# Altium PCB EvvGC v1.3.PcbDoc
Units mm, origin at the board's own origin, x right, y up, seen from the top; angles counter-clockwise.
Board outline 50 x 50 mm, 2 copper layers (Top Layer, Bottom Layer); 98 components, 78 nets, 374 pads, 100 vias.
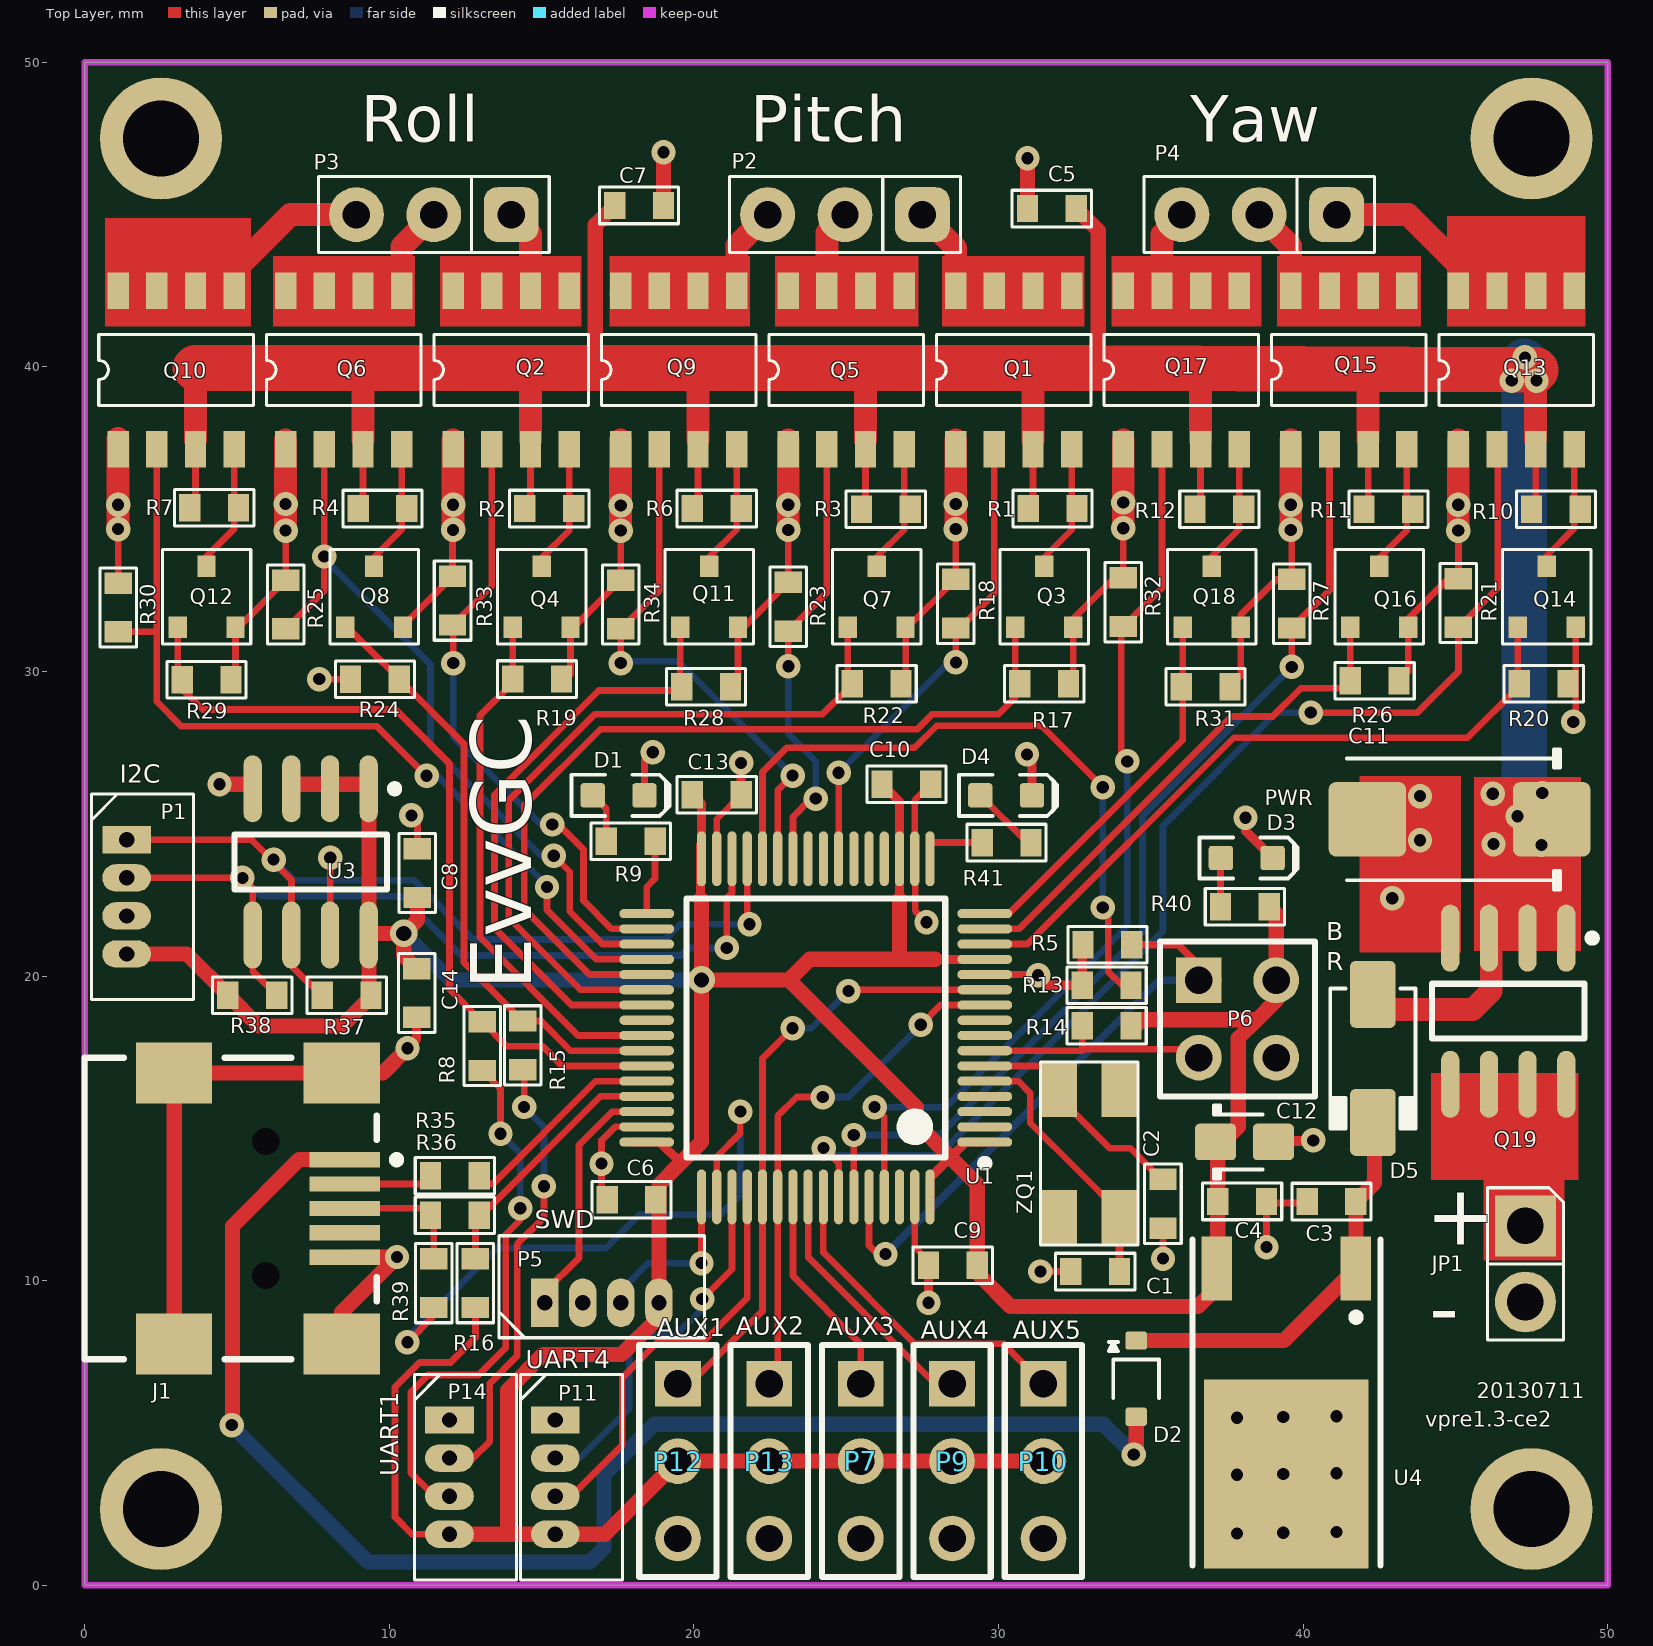
[diagram p0: Top Layer view]
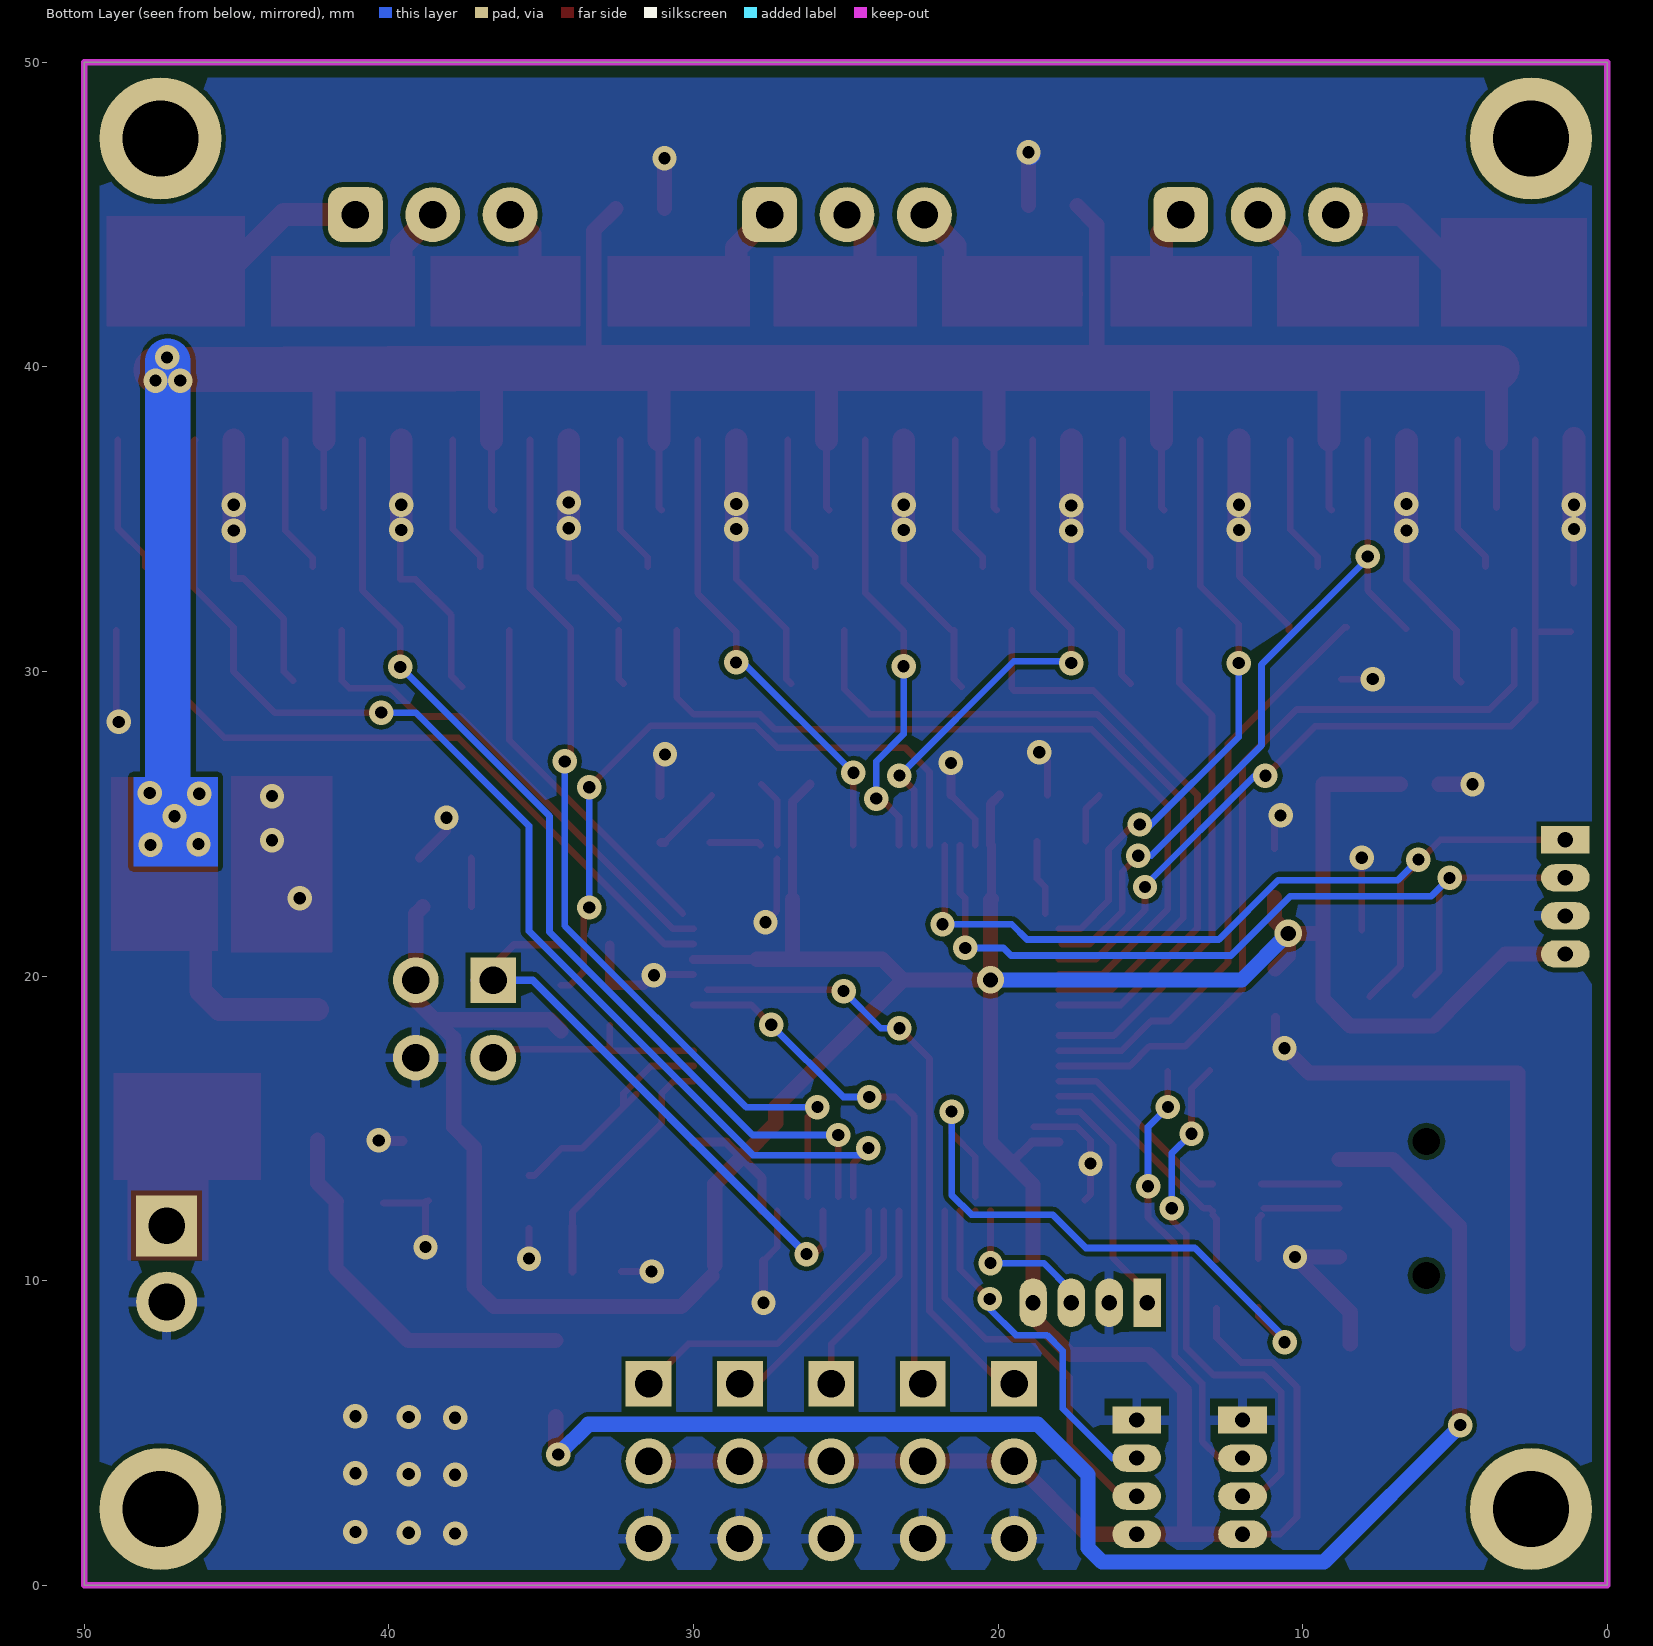
[diagram p1: Bottom Layer view, seen from below]

## Layer stack, top to bottom
Top Layer: signal copper 0.0356
Dielectric: dielectric 0.32, FR-4, Dk 4.8
Bottom Layer: signal copper 0.0356

## Board outline
0,0 0,50 50,50 50,0

## Design rules (kind name [scope] priority, off if disabled: settings)
Clearance Clearance_1 [(OnLayer('Keep-Out Layer')) vs inPolygon] p1: gap=0.381
Clearance [All] p2: gap=0.152
ComponentClearance [All] p1 off: gap=0.254 collisioncheckmode=3 verticalgap=0.254 showdistances=FALSE
Height [All] p1 off: minheight=0 maxheight=25.4 prefheight=12.7
HoleSize [All] p1: absolutevalues=TRUE maxlimit=2.54 minlimit=0.33 maxpercent=80.000 minpercent=20.000
HoleToHoleClearance [All] p1: gap=0.254 allowstackedmicrovias=FALSE
MinimumAnnularRing [All] p1: minimumring=0.178
MinimumSolderMaskSliver [All] p1 off: minsoldermaskwidth=0.254
NetAntennae [All] p1 off: netantennaetolerance=0
PolygonConnect [IsPoly vs IsVia] p1: connectstyle=Direct reliefconductorwidth=0.254 reliefentries=4 polygonreliefangle="90 Angle" airgapwidth=0.254
PolygonConnect PolygonConnect_1 [All] p2: connectstyle=Relief reliefconductorwidth=0.3 reliefentries=4 polygonreliefangle="90 Angle" airgapwidth=0.254
RoomDefinition "EvvGC v1.3" [InComponentClass('EvvGC v1.3')] p1 off: confinementstyle=ConfineIn formatcopy=TRUE lockcomponents=FALSE outline -128.3,-50.8 -77.5,-50.8 -77.5,-25.4 -128.3,-25.4
RoutingVias [All] p1: holewidth=0.4 width=0.8 viastyle="Through Hole" minholewidth=0.4 minwidth=0.8 maxholewidth=0.4 maxwidth=0.8
SilkToSilkClearance [All] p1 off: silktosilkclearance=0.254
SilkToSolderMaskClearance SilkscreenOverComponentPads [IsPad] p1 off: minsilkscreentomaskgap=0.254 clearancetoexposedcopper=TRUE
SolderMaskExpansion [All] p1: expansion=0.05
Width [All] p1: maxlimit=2 minlimit=0.152 preferedwidth=0.22
20 further rules are at their usual default settings.

## Components (designator, comment, footprint, x,y, rotation, side; value= is the part's Value field where it differs from the comment)
C1 "22pF" c-0603 33.975,10.3 r180 top
C2 "22pF" c-0603 35.4,13.325 r270 top
C3 "100nF" c-0603 41.732,12.598 r180 top
C4 "100nF" C-0603 37.2,12.6 r0 top
C5 "100nF" c-0603 32.55,45.2 r180 top
C6 "100nF" c-0603 18.75,12.65 r180 top
C7 "100nF" c-0603 17.4,45.3 r0 top
C8 "100nF" c-0603 10.922,22.581 r90 top
C9 "100nF" c-0603 29.3,10.5 r180 top
C10 "100nF" c-0603 26.175,26.3 r0 top
C11 "100uF25V" CAPMP7343X310N 45.136,25.146 r180 top
C12 "10uF6.3v" CAPMP2012X150USR 38.075,14.554 r0 top
C13 "100nF" c-0603 19.95,25.95 r0 top
C14 "1uF" c-0603 10.897,20.244 r270 top (schematic designator C8)
D1 "APT1608SGC" LED-0603-GREEN 17.526,25.933 r0 top
D2 "SS14" SOD323 34.519,6.782 r270 top
D3 "APT1608QBC/D" LED-0603-BLUE 38.151,23.876 r0 top
D4 "APT1608SGC" LED-0603-GREEN 30.251,25.933 r0 top
D5 "SS14" DO-214AC 42.291,17.297 r270 top (schematic designator D2)
J1 "USB Mini" 440247 0.686,12.37 r180 top
JP1 "POWER" IDC1-2P 47.3,11.8 r270 top
P1 "I2C" H53047-04 1.375,24.475 r270 top
P2 "Header 3" IDC1-3M 27.5,45 r0 top
P3 "Header 3" IDC1-3M 14,45 r0 top
P4 "Header 3" IDC1-3M 41.1,45 r0 top
P5 "SWD" H53047-04 15.1,9.275 r0 top
P6 "BOOT" HDR2X2 36.576,19.863 r270 top
P7 "Aux3" HDR1X3 25.475,6.615 r270 top
P9 "Aux4" HDR1X3 28.475,6.615 r270 top
P10 "Aux5" HDR1X3 31.475,6.615 r270 top
P11 "UART4" H53047-04 15.45,5.425 r270 top locked
P12 "Aux1" HDR1X3 19.475,6.615 r270 top
P13 "Aux2" HDR1X3 22.475,6.615 r270 top
P14 "UART1" H53047-04 11.975,5.425 r270 top
Q1 "SI4599DY" SO8-(SOT-96-1) 28.595,37.3 r90 top
Q2 "SI4599DY" SO8-(SOT-96-1) 12.095,37.3 r90 top
Q3 "BSS123" SOT-23 30.55,31.45 r0 top
Q4 "BSS123" SOT-23 14.05,31.45 r0 top
Q5 "SI4599DY" SO8-(SOT-96-1) 23.095,37.3 r90 top
Q6 "SI4599DY" SO8-(SOT-96-1) 6.595,37.3 r90 top
Q7 "BSS123" SOT-23 25.05,31.45 r0 top
Q8 "BSS123" SOT-23 8.55,31.45 r0 top
Q9 "SI4599DY" SO8-(SOT-96-1) 17.595,37.3 r90 top
Q10 "SI4599DY" SO8-(SOT-96-1) 1.095,37.3 r90 top
Q11 "BSS123" SOT-23 19.55,31.45 r0 top
Q12 "BSS123" SOT-23 3.05,31.45 r0 top
Q13 "SI4599DY" SO8-(SOT-96-1) 45.095,37.3 r90 top
Q14 "BSS123" SOT-23 47.05,31.45 r0 top
Q15 "SI4599DY" SO8-(SOT-96-1) 39.595,37.3 r90 top
Q16 "BSS123" SOT-23 41.55,31.45 r0 top
Q17 "SI4599DY" SO8-(SOT-96-1) 34.095,37.3 r90 top
Q18 "BSS123" SOT-23 36.05,31.45 r0 top
Q19 "IRF9335" SO-8_N 46.736,18.847 r270 top
R1 "330" r-0603 32.575,35.35 r180 top
R2 "330" r-0603 16.05,35.35 r180 top
R3 "330" r-0603 27.1,35.325 r180 top
R4 "330" r-0603 10.575,35.35 r180 top
R5 "10k" R-0603 34.375,21.025 r180 top
R6 "330" r-0603 21.55,35.35 r180 top
R7 "330" r-0603 5.05,35.375 r180 top
R8 "100" R-0603 13.05,18.5 r270 top
R9 "330" R-0603 18.725,24.425 r180 top
R10 "330" r-0603 49.1,35.325 r180 top
R11 "330" r-0603 43.6,35.325 r180 top
R12 "330" r-0603 38.05,35.325 r180 top
R13 "10k" R-0603 32.75,19.7 r0 top
R14 "10k" R-0603 32.75,18.375 r0 top
R15 "100" R-0603 14.375,18.525 r270 top
R16 "1k5" R-0603 12.827,9.119 r90 top
R17 "1k" r-0603 32.3,29.6 r180 top
R18 "1k" r-0603 28.6,33.025 r270 top
R19 "1k" r-0603 15.65,29.752 r180 top
R20 "1k" r-0603 48.7,29.6 r180 top
R21 "1k" r-0603 45.1,33.05 r270 top
R22 "1k" r-0603 26.8,29.6 r180 top
R23 "1k" r-0603 23.1,32.925 r270 top
R24 "1k" r-0603 8.725,29.75 r0 top
R25 "1k" r-0603 6.6,33 r270 top
R26 "1k" r-0603 43.15,29.7 r180 top
R27 "1k" r-0603 39.625,33.025 r270 top
R28 "1k" r-0603 21.2,29.5 r180 top
R29 "1k" r-0603 4.8,29.726 r180 top
R30 "1k" r-0603 1.1,32.9 r270 top
R31 "1k" r-0603 37.6,29.5 r180 top
R32 "1k" r-0603 34.1,33.075 r270 top
R33 "1k" r-0603 12.075,33.125 r270 top
R34 "1k" r-0603 17.6,33 r270 top
R35 "22" R-0603 12.95,13.45 r180 top
R36 "22" R-0603 12.95,12.15 r180 top
R37 "4.7k" R-0603 7.8,19.376 r0 top
R38 "4.7k" R-0603 6.3,19.375 r180 top
R39 "220" R-0603 11.455,9.119 r90 top (schematic designator R16)
R40 "1k" R-0603 38.887,22.276 r180 top (schematic designator R9)
R41 "330" R-0603 29.464,24.384 r0 top (schematic designator R9)
U1 "STM32F103RCT6" LQFP64_N 24,18.3 r180 top locked
U3 "24C02C-E/SN" SOIC-SN8_N 7.417,23.749 r270 top
U4 "78M33" TO-252 39.45,7.025 r180 top
ZQ1 "8MHz" 7B_6x3.2 34.075,11.975 r90 top

## Footprints (in the part's own frame and the unit in brackets; to place one, negate y for a bottom-side part, rotate by r counter-clockwise, add the part's x,y. Pads: shape width x height; smd on the part's side, far side on the other; paste and mask are expansions set on the pad)
7B_6x3.2 [mm]
  rect 1.8x1.2 smd: 1(0.1,0.1) 2(4.3,2.1) 3(4.3,0.1) 4(0.1,2.1)
  silkscreen extent -0.8,-0.5 5.2,2.7
440247 [mm] "Connector; USB2.0, Type B, SM; 5 Position; Right Angle"
  rect 2.3x0.5 smd: 1(-7.85,-1.6) 2(-7.85,-0.8) 3(-7.85,0) 4(-7.85,0.8) 5(-7.85,1.6)
  rect 2.5x2 smd: 6(-7.75,4.45) 7(-2.25,4.45) 8(-7.75,-4.45) 9(-2.25,-4.45)
  round 0.6 hole 0.9 unplated: MH1(-5.25,2.2) MH2(-5.25,-2.2)
  silkscreen extent -9.68,-4.95 0.7,4.95
c-0603 [mm]
  rect 0.7x0.9 smd: 1(0,0) 2(1.6,0)
  silkscreen extent -0.5,-0.6 2.1,0.6
C-0603 [mm]
  rect 0.7x0.9 smd: 1(0,0) 2(1.6,0)
  silkscreen extent -0.5,-0.6 2.1,0.6
CAPMP2012X150USR [mm] "Molded body capacitor, Body 2.0x1.2mm, 0805, IPC Medium Density"
  round 0.254 on Mech14: 0(0,0)
  rrect25% 1.35x1.2 smd: 1(-0.95,0) 2(0.95,0)
  Top Layer pour cut-out: -0.4,0.8 0.4,0.8 0.4,-0.8 -0.4,-0.8
  silkscreen extent -1,-1.2 0.6,1.2, body extent -1.02,-0.67 1.03,0.68, height 1.5
CAPMP7343X310N [mm] "Molded body capacitor, Body 7.3x4.3mm, 2917, IPC Nominal settings"
  round 1 on Mech14: 0(0,0)
  rrect20% 2.55x2.45 smd: 1(-3.025,0) 2(3.025,0)
  silkscreen extent -3.3,-2.3 3.7,2.3, body extent -3.8,-1.97 3.8,1.98, height 3.1
DO-214AC [mm] "JEDEC DO214 variation AC. SMA"
  round 0.508 on Mech14: 0(0,0)
  rrect25% 2.2x1.5 smd: A(-2.1,0) K(2.1,0)
  silkscreen extent -2.3,-1.4 2.3,1.4, body extent -2.6,-1.3 2.6,1.3, height 2.42
H53047-04 [mm]
  rect 0.9x1.6 hole 0.5: 1(0,0)
  oval 0.9x1.6 hole 0.5: 2(1.25,0) 3(2.5,0) 4(3.75,0)
  silkscreen extent -1.5,-1.15 5.25,2.2
HDR1X3 [mm] "Connector; Header; 3 Position"
  rect 1.5x1.5 hole 0.9: 1(0,0)
  round 1.5 hole 0.9: 2(2.54,0) 3(5.08,0)
  silkscreen extent -1.27,-1.27 6.35,1.27
HDR2X2 [mm] "Connector; Header; 2x2 Position"
  rect 1.5x1.5 hole 0.9: 1(0,0)
  round 1.5 hole 0.9: 2(0,2.54) 3(2.54,0) 4(2.54,2.54)
  silkscreen extent -1.27,-1.27 3.81,3.81
IDC1-2P [mm]
  rect 2x2 hole 1.2: 1(0,0)
  round 2 hole 1.2: 2(2.5,0)
  silkscreen extent -1.25,-1.25 3.75,1.25
IDC1-3M [mm]
  rrect50% 1.8x1.8 hole 0.9: 1(0,0)
  round 1.8 hole 0.9: 2(-2.54,0) 3(-5.08,0)
  silkscreen extent -6.33,-1.25 1.25,1.25
LED-0603-BLUE [mm]
  round 0.254 on Mech14: 0(0,0)
  rrect25% 0.8x0.8 smd: A(-0.85,0) K(0.85,0)
  Top Layer pour cut-out: -0.5,0.5 0.5,0.5 0.5,-0.5 -0.5,-0.5
  silkscreen extent -1.55,-0.67 1.68,0.67, body extent -0.8,-0.4 0.8,0.4, height 0.75
LED-0603-GREEN [mm]
  round 0.254 on Mech14: 0(0,0)
  rrect25% 0.8x0.8 smd: A(-0.85,0) K(0.85,0)
  Top Layer pour cut-out: -0.5,0.5 0.5,0.5 0.5,-0.5 -0.5,-0.5
  silkscreen extent -1.55,-0.67 1.68,0.67, body extent -0.8,-0.4 0.8,0.4, height 0.75
LQFP64_N [mm] "Thin QFP, 64-Leads, Body 10x10mm, Pitch 0.5mm, IPC Medium Density"
  oval 1.8x0.3 smd: 1(-5.55,3.75) 2(-5.55,3.25) 3(-5.55,2.75) 4(-5.55,2.25) 5(-5.55,1.75) 6(-5.55,1.25) 7(-5.55,0.75) 8(-5.55,0.25) 9(-5.55,-0.25) 10(-5.55,-0.75) 11(-5.55,-1.25) 12(-5.55,-1.75) 13(-5.55,-2.25) 14(-5.55,-2.75) 15(-5.55,-3.25) 16(-5.55,-3.75) 33(5.55,-3.75) 34(5.55,-3.25) 35(5.55,-2.75) 36(5.55,-2.25) 37(5.55,-1.75) 38(5.55,-1.25) 39(5.55,-0.75) 40(5.55,-0.25) 41(5.55,0.25) 42(5.55,0.75) 43(5.55,1.25) 44(5.55,1.75) 45(5.55,2.25) 46(5.55,2.75) 47(5.55,3.25) 48(5.55,3.75)
  oval 0.3x1.8 smd: 17(-3.75,-5.55) 18(-3.25,-5.55) 19(-2.75,-5.55) 20(-2.25,-5.55) 21(-1.75,-5.55) 22(-1.25,-5.55) 23(-0.75,-5.55) 24(-0.25,-5.55) 25(0.25,-5.55) 26(0.75,-5.55) 27(1.25,-5.55) 28(1.75,-5.55) 29(2.25,-5.55) 30(2.75,-5.55) 31(3.25,-5.55) 32(3.75,-5.55) 49(3.75,5.55) 50(3.25,5.55) 51(2.75,5.55) 52(2.25,5.55) 53(1.75,5.55) 54(1.25,5.55) 55(0.75,5.55) 56(0.25,5.55) 57(-0.25,5.55) 58(-0.75,5.55) 59(-1.25,5.55) 60(-1.75,5.55) 61(-2.25,5.55) 62(-2.75,5.55) 63(-3.25,5.55) 64(-3.75,5.55)
  silkscreen extent -5.68,-4.25 4.25,4.57, body extent -5,-5 5,5, height 1.6
r-0603 [mm]
  rect 0.7x0.9 smd: 1(0,0) 2(1.6,0)
  silkscreen extent -0.5,-0.6 2.1,0.6
R-0603 [mm]
  rect 0.7x0.9 smd: 1(0,0) 2(1.6,0)
  silkscreen extent -0.5,-0.6 2.1,0.6
SO8-(SOT-96-1) [mm]
  rect 1.2x0.7 smd: 1(0,0) 2(0,-1.27) 3(0,-2.54) 4(0,-3.81) 5(5.2,-3.81) 6(5.2,-2.54) 7(5.2,-1.27) 8(5.2,0)
  silkscreen extent 1.43,-4.44 3.77,0.64
SO-8_N [mm] "SOIC, 8-Leads, Body 4.9x3.9mm, Pitch 1.27mm, IPC Medium Density"
  oval 2.2x0.6 smd: 1(-2.4,1.905) 2(-2.4,0.635) 3(-2.4,-0.635) 4(-2.4,-1.905) 5(2.4,-1.905) 6(2.4,-0.635) 7(2.4,0.635) 8(2.4,1.905)
  silkscreen extent -2.52,-2.5 0.9,2.88, body extent -2,-2.5 2,2.5, height 1.75
SOD323 [mm] "SOD-323; 2 Leads; Body 1.8 x 1.35 mm, (LxW)"
  round 0.508 on Mech14: 0(0,0)
  rrect25% 0.6x0.7 smd: A(1.25,0) K(-1.25,0)
  silkscreen extent -1.2,-0.9 0.64,0.75, body extent -1.3,-0.68 1.3,0.68, height 1.1
SOIC-SN8_N [mm] "SOIC, 8-Leads, Body 4.9x3.8mm, Pitch 1.27mm, IPC Medium Density"
  oval 2.2x0.6 smd: 1(-2.4,1.905) 2(-2.4,0.635) 3(-2.4,-0.635) 4(-2.4,-1.905) 5(2.4,-1.905) 6(2.4,-0.635) 7(2.4,0.635) 8(2.4,1.905)
  silkscreen extent -2.52,-2.5 0.9,2.88, body extent -2,-2.5 2,2.5, height 1.75
SOT-23 [mm]
  rect 0.6x0.7 smd: 1(0,0) 2(1.9,0) 3(0.95,2)
  silkscreen extent -0.5,-0.55 2.4,2.55
TO-252 [mm] "D-PAK/TO-252-AA; 3 Leads (1 Cropped); Body 10.1 (inc. leads) x 6.6 mm (LxW max)"
  rect 1x2.1 smd: 1(-2.285,-3.375) 3(2.285,-3.375)
  rect 5.4x6.2 smd: 4(0,3.375)
  silkscreen extent -3.09,-4.32 3.09,6.38

## Part data
C1 C2 C3 C4 C5 C6 C7 C8 C9 C10 C13 C14: library part CAP0805, "Capacitor"
C11 C12: library part CT, "Capacitor Tantalum"
D1 D3 D4: library part LED
D2 D5: library part "DIODE SCHOTTKY", "Diode"
J1: library part 440247-2, "USB 2.0, Right Angle, SMT, B Type, Receptacle, 5 Position, Black"
JP1: library part CON2, "Header, 2-Pin"
P1 P5 P11 P14: library part "Header 4", "0530470410"
P2 P3 P4: "Header, 3-Pin"
P6: library part "Header 2X2", "Header, 2-Pin, Dual row"
P7 P9 P10 P12 P13: library part "Header 3", "Header, 3-Pin"
Q1 Q2 Q5 Q6 Q9 Q10 Q13 Q15 Q17: library part AUIRF7343, "HEXFET Power MOSFET"
Q3 Q4 Q7 Q8 Q11 Q12 Q14 Q16 Q18: library part 2N7002, "N-channel Enhancement Mode Field-effect Transistor"
Q19: library part IRF7404, "HEXFET Power MOSFET"
R1 R2 R3 R4 R6 R7 R10 R11 R12 R17 R18 R19 R20 R21 R22 R23 R24 R25 R26 R27 R28 R29 R30 R31 R32 R33 R34 R39: library part Res, "Resistor"
R5 R8 R9 R13 R14 R15 R16 R35 R36 R37 R38 R40 R41: library part "RES 0603 330R", "Resistor"
U1: library part STM32F103RBT6, "STM32 ARM-based 32-bit MCU with 128 Kbytes Flash, 64-pin LQFP, Industrial Temperature"
U3: "2Kbit, 400kHz, 5V, I2C Serial EEPROM, 8-Pin SOIC 150mil, Extended Temperature"
U4: library part L78M05CDT, "Positive Voltage Regulator"
ZQ1: library part ZQ_KX12B, "7B-8.000MAAJ-T"

## Free pads (board coordinates)
  round 4 hole 2.5: 0(2.5,2.5) 0(2.5,47.5) 0(47.5,2.5) 0(47.5,47.5)

## Via types
v1: diameter 0.8, hole 0.4, Top Layer to Bottom Layer, tented both sides, 98 vias
v2: diameter 0.9, hole 0.5, Top Layer to Bottom Layer, tented both sides, 2 vias

## Nets (pads, with @x,y where several pads share a name; then routed paths per layer and width w, separated by ;. In a path a pad name is that pad's centre, name@x,y a point inside that pad or via, vN(x,y) a via of type N, cw(c..) or ccw(c..) an arc to the next point about the centre after c; other vN are vias at no path point)
3V-IN: C3.1 D2.K D5.K U4.1 | length 12.7
  Top Layer w0.5: D2.K 39.367,8.032 U4.1 41.735,12.596 C3.1 42.342,13.208 D5.K@42.342,14.613
12V: JP1.1 Q19.5 Q19.6 Q19.7 Q19.8
"12V MOTOR": C5.1 C7.1 C11.1 D5.A Q1.3 Q2.3 Q5.3 Q6.3 Q9.3 Q10.3 Q13.3 Q15.3 Q17.3 Q19.1 Q19.2 Q19.3 R1.2 R2.2 R3.2 R4.2 R6.2 R7.2 R10.2 R11.2 R12.2 | length 115.8
  Top Layer w0.22: R7.2@3.635,35.385 Q10.3@3.635,37.6 ; R4.2@9.05,35.3 9.135,35.385 Q6.3@9.135,37.6 ; R2.2@14.55,35.3 14.635,35.385 Q2.3@14.635,37.6 ; R6.2@20.05,35.3 20.135,35.385 Q9.3@20.135,37.6 ; R3.2@25.55,35.3 25.635,35.385 Q5.3@25.635,37.6 ; R1.2@31.05,35.3 31.135,35.385 Q1.3@31.135,37.6 ; R12.2@36.55,35.3 36.635,35.385 Q17.3@36.635,37.6 ; R11.2@42.135,35.385 Q15.3@42.135,37.6 ; R10.2@47.635,35.385 Q13.3 Q13.3@47.635,37.6
  Top Layer w0.5: 16.739,39.965 16.764,39.99 16.764,44.664 C7.1 ; C5.1 33.275,44.475 33.275,39.965
  Top Layer w0.75: Q10.3@3.635,37.6 3.635,39.965 ; Q6.3@9.135,37.6 9.135,39.9 ; Q2.3@14.635,37.6 14.635,39.93 ; Q9.3@20.135,37.6 20.135,39.9 ; Q5.3@25.635,37.6 25.635,39.8 ; Q1.3@31.135,37.6 31.135,39.8 ; Q17.3@36.635,37.6 36.635,39.83 ; Q15.3@42.135,37.6 42.135,39.9 ; D5.A@42.342,18.9 45.57,18.9 46.177,19.507 Q19.3@46.177,20.993 ; Q13.3@47.635,37.6 v1@47.635,39.9
  Top Layer w1.5: 3.635,39.965 16.739,39.965 33.275,39.965 46.877,39.903 47.28,39.902 v1@47.635,39.9
  Bottom Layer w1.5: 47.26,26.28 v1@47.26,40.183
  other v1: 47.828,24.308 46.253,24.333 47.041,25.248 46.228,25.984 47.854,26.01 46.85,39.55 47.662,39.55 47.281,40.312
+3.3V: C4.1 C6.1 C8.1 C9.1 C10.1 C12.1 C13.1 C14.1 P1.4 P5.4 P6.2 P7.2 P9.2 P10.2 P11.4 P12.2 P13.2 P14.4 R14.2 R16.1 R37.2 R38.2 R40.1 U1.1 U1.13 U1.19 U1.32 U1.48 U1.64 U3.1 U3.2 U3.3 U3.8 U4.3 | length 154.3
  Top Layer w0.22: P14.4 10.746,1.675 10.185,2.235 10.185,6.502 10.996,7.313 12.012,7.313 12.827,8.128 R16.1@12.827,9.093
  Top Layer w0.3: U1.48@18,14.55 18.882,14.55 19.566,13.866 ; C13.1 20.25,25.65 U1.32@20.25,24.3 ; 20.218,22.53 U1.32@20.218,24.3 ; C10.1 26.75,25.725 26.75,22.525 ; U1.64@27.75,12.3 27.75,13.375 28.425,14.05 28.925,14.55 U1.1@30,14.55 ; 27.925,20.55 U1.13@30,20.55
  Top Layer w0.5: P1.4 3.35,20.725 R38.2 5.711,18.364 8.439,18.364 9.33,19.255 9.33,20.225 ; U3.3@6.79,26.3 9.33,26.3 U3.8@9.33,21.375 ; R37.2@9.33,19.395 9.33,20.225 ; U3.8@9.33,20.605 U3.8@9.33,21.375 ; C14.1 10.475,20.665 v2(10.475,21.4) ; C8.1 10.922,21.847 v2(10.475,21.4) ; P14.4 13.876,1.675 ; P5.4@18.75,9.375 P5.4 ; 20.218,22.53 20.25,22.498 v2(20.25,19.875) ; 26.75,20.55 26.75,22.525 ; 27.925,20.55 23.8,20.55 23.125,19.875 ; C9.1 29.3,13.175 28.425,14.05 27.3,15.175 27.3,15.7 23.125,19.875 ; C9.1@29.4,10.15 30.4,9.15 36.55,9.15 37.2,9.8 C4.1 37.2,14.375 37.871,15.046 37.871,17.958 38.481,18.567 ; P10.2 P9.2 P7.2 P13.2 P12.2 17.075,1.675 P11.4 13.876,1.675 ; R14.2@34.35,18.2 34.717,18.567 38.481,18.567 ; R40.1 39.116,22.047 P6.2 39.116,19.202 38.481,18.567 ; 9.33,20.225 U3.8@9.33,21.375 ; U3.8@9.33,21.375 9.355,21.4 v2(10.475,21.4) ; 13.876,1.675 13.876,6.401 15.05,7.575 17.625,7.575 18.85,8.8 P5.4 ; P5.4 18.85,13.15 19.566,13.866 20.25,14.55 v2(20.25,19.875) ; v2(20.25,19.875) 23.125,19.875
  Bottom Layer w0.5: v2(10.475,21.4) 12,19.875 v2(20.25,19.875)
+5V: D2.A J1.1 | length 47.8
  Top Layer w0.5: v1@4.851,5.258 4.851,11.786 7.041,13.975 J1.1@8.8,13.975 ; v1(34.442,4.293) 34.519,4.369 D2.A
  Bottom Layer w0.5: v1(4.826,5.258) 4.826,5.237 9.301,0.762 16.586,0.762 17.043,1.219 17.043,3.632 18.694,5.283 33.452,5.283 v1(34.442,4.293)
AUX1: P12.1 U1.11 U1.53 | length 20.4
  Top Layer w0.22: P12.1@19.4,6.69 P12.1 19.865,6.615 22.25,9 22.25,12.3 22.25,17.297 v1(23.241,18.288) ; v1(25.07,19.507) 25.113,19.55 U1.11
  Bottom Layer w0.22: v1(23.241,18.288) 23.851,18.288 v1(25.07,19.507)
AUX2: P13.1 U1.10 U1.54 | length 19.1
  Top Layer w0.22: P13.1@22.475,6.75 P13.1 22.75,6.89 22.75,10.726 ; 22.75,9.45 22.75,10.726 ; v1(24.232,16.027) 23.377,16.027 22.75,15.4 22.75,12.3 22.75,10.726 ; v1(27.45,18.4) 28.1,19.05 U1.10@30,19.05
  Bottom Layer w0.22: v1(24.232,16.027) 25.073,16.027 ; 25.075,16.025 v1(27.45,18.4)
AUX3: P7.1 U1.55 | length 6.6
  Top Layer w0.22: U1.55@23.25,12.3 23.25,11.151 23.25,10.15 25.475,7.925 P7.1
AUX4: P9.1 U1.56 | length 8
  Top Layer w0.22: U1.56@23.75,12.3 23.75,10.775 27.91,6.615 P9.1
AUX5: P10.1 U1.57 | length 10.4
  Top Layer w0.22: U1.57@24.25,12.3 24.25,10.925 27.25,7.925 30.165,7.925 P10.1
BOOT0: P6.1 R5.1 U1.60 | length 19.4
  Top Layer w0.22: U1.60@25.75,12.3 25.75,11.15 26.028,10.872 v1(26.288,10.872)
  Top Layer w0.254: R5.1 35.905,21.025 36.576,20.354 P6.1 ; P6.1@37.067,19.863 P6.1@37.211,19.863
  Bottom Layer w0.22: P6.1@36.817,19.622 37.059,19.863 P6.1@37.211,19.863
  Bottom Layer w0.254: v1(26.288,10.872) 35.278,19.863 P6.1
BOOT1: R13.2 U1.28 | length 22.1
  Top Layer w0.22: U1.28@22.25,24.3 22.25,26.7 23.05,27.5 27.251,27.5 27.971,28.219 31.406,28.219 v1(33.425,26.2) ; v1(33.425,22.25) 33.6,22.075 33.6,20.15 34.05,19.7 R13.2
  Bottom Layer w0.22: v1(33.425,22.25) v1(33.425,26.2)
DM: R35.1 U1.44 | length 6.4
  Top Layer w0.22: R35.1@12.95,13.175 13.4,13.175 16.775,16.55 U1.44@18,16.55
DP: R16.2 R36.1 U1.45 | length 8.1
  Top Layer w0.22: R16.2@12.827,10.693 12.827,12.027 R36.1 ; R36.1@12.95,12.275 13.05,12.375 13.25,12.375 16.925,16.05 U1.45@18,16.05
GND: C1.2 C2.2 C3.2 C4.2 C5.2 C6.2 C7.2 C8.2 C9.2 C10.2 C11.2 C12.2 C13.2 C14.2 D1.K D3.K D4.K J1.5 J1.6 J1.7 J1.8 J1.9 JP1.2 P1.3 P5.2 P6.4 P7.3 P9.3 P10.3 P11.1 P12.3 P13.3 P14.1 Q1.1 Q2.1 Q3.2 Q4.2 Q5.1 Q6.1 Q7.2 Q8.2 Q9.1 Q10.1 Q11.2 Q12.2 Q13.1 Q14.2 Q15.1 Q16.2 Q17.1 Q18.2 Q19.4 R5.2 R13.1 R17.1 R18.1 R19.1 R20.1 R21.1 R22.1 R23.1 R24.1 R25.1 R26.1 R27.1 R28.1 R29.1 R30.1 R31.1 R32.1 R33.1 R34.1 U1.12 U1.18 U1.31 U1.47 U1.63 U3.4 U3.7 U4.4 | length 138.3
  Top Layer w0.22: v1(1.095,34.675) 1.1,34.67 R30.1 ; v1@4.375,26.25 v1(4.425,26.3) ; R29.1@4.8,29.65 4.95,29.8 4.95,31.35 6.595,32.995 v1(6.595,34.625) ; v1@7.675,29.725 v1(7.7,29.75) R24.1 ; U3.7@8.06,21.5 v1(8.06,23.885) v1@8.15,23.975 ; Q8.2@10.45,31.35 10.45,31.5 R33.1 12.075,34.63 v1(12.095,34.65) ; v1(10.725,25.275) 10.922,25.078 C8.2 ; R19.1@15.65,29.6 15.95,29.9 15.95,31.35 17.595,32.995 v1(17.595,34.625) ; C6.2 16.967,12.833 16.967,14.605 17.412,15.05 U1.47@18.825,15.05 ; D1.K 18.376,27.076 v1(18.65,27.35) ; U1.31@20.75,24.3 20.75,25.15 C13.2 ; R28.1 21.45,29.75 21.45,31.35 21.525,31.35 23.095,32.92 v1(23.095,34.65) ; R22.1 26.95,29.75 26.95,31.385 28.595,33.03 R18.1 28.6,34.67 v1(28.595,34.675) ; U1.63@27.25,12.3 27.25,11.1 C9.2@27.7,10.65 ; U1.18 27.262,23.838 27.262,22.141 v1(27.635,21.768) ; U1.18@27.25,24.3 27.25,25.775 C10.2 ; U1.12@30,20.05 31.275,20.05 v1(31.3,20.025) ; v1(31.375,10.3) C1.2 ; R17.1 32.45,29.75 Q3.2@32.45,31.35 ; Q3.2@32.45,31.725 33.8,33.075 R32.1 v1@34.1,34.695 ; v1(35.4,10.725) C2.2 ; R31.1 37.95,29.85 37.95,31.85 39.125,33.025 R27.1 v1@39.625,34.62 ; C4.2@38.775,12.55 C4.2@38.8,12.55 ; v1(38.8,11.1) C4.2@38.8,12.55 ; C4.2 C4.2@38.8,12.55 ; C3.2@40.175,12.55 C4.2@38.8,12.55 ; R26.1 43.45,30 43.45,31.725 44.775,33.05 R21.1 v1@45.1,34.62 ; v1(48.87,28.346) 48.95,28.427 Q14.2@48.95,31.35
  Top Layer w0.3: v1(10.598,17.63) 10.897,17.928 C14.2 ; C13.2 v1(21.55,27) ; v1(27.7,9.275) C9.2@27.7,10.65 ; v1(30.937,27.28) 31.101,27.115 D4.K ; v1(31.3,20.025) 31.625,19.7 R13.1 R5.2@32.75,21.025 ; v1(38.111,25.197) 38.111,24.766 D3.K
  Top Layer w0.33: C12.2@39.558,14.58 v1@40.335,14.58
  Top Layer w0.5: J1.7 J1.9 J1.8 9.788,16.82 v1(10.598,17.63) ; v1(4.425,26.3) U3.4@5.52,26.3 ; J1.6 8.436,8.961 v1(10.25,10.775) J1.5@8.8,10.775 ; C7.2 v1(19,47.05) ; C5.2 v1(30.95,46.85)
  Top Layer w0.75: v1(1.095,34.675) v1(1.095,35.475) Q10.1@1.095,37.65 ; v1(6.595,34.625) v1(6.595,35.5) Q6.1@6.595,37.6 ; v1(12.095,34.65) v1(12.095,35.475) Q2.1@12.095,37.6 ; v1(17.595,34.625) v1(17.595,35.45) Q9.1@17.595,37.6 ; v1(23.095,34.65) v1(23.095,35.475) Q5.1@23.095,37.6 ; v1(28.595,34.675) v1(28.595,35.5) Q1.1@28.595,37.6 ; v1(34.095,34.7) v1(34.095,35.55) Q17.1@34.095,37.6 ; v1(39.595,34.65) v1(39.595,35.475) Q15.1@39.595,37.6 ; v1(45.095,34.625) v1(45.095,35.475) Q13.1@45.095,37.6
  Bottom Layer w0.5: v1@18.85,46.95 v1@18.9,46.9
  other v1: 37.825,1.7 39.35,1.725 41.1,1.75 37.825,3.625 39.35,3.65 41.1,3.675 37.825,5.5 39.35,5.525 41.1,5.55 16.967,13.843 40.335,14.605 42.926,22.555 43.84,24.46 43.84,25.908
LED1: R9.1 U1.33 | length 2.5
  Top Layer w0.22: U1.33 18.45,22.925 18.725,23.2 R9.1
LED2: R41.1 U1.17 | length 1.7
  Top Layer w0.22: U1.17@27.802,24.3 27.886,24.384 R41.1
NetC1_1: C1.1 U1.5 ZQ1.1 | length 8.3
  Top Layer w0.22: U1.5@30,16.55 30.65,16.55 31.04,16.16 31.04,15.185 32.65,13.575 33.975,12.25 ZQ1.1 ZQ1.1@33.975,11.775
  Top Layer w0.254: C1.1 ZQ1.1@33.975,11.775
NetC2_1: C2.1 U1.6 ZQ1.2 | length 7.8
  Top Layer w0.22: U1.6@30,17.05 31.4,17.05 32.3,16.15 ZQ1.2@32.3,15.7 ; ZQ1.2@31.875,16.125 33.65,14.35 34.325,14.35 35.225,13.45 C2.1@35.4,13.45
NetD1_A: D1.A R9.2 | length 1.7
  Top Layer w0.22: D1.A 17.125,25.484 R9.2
NetD3_A: D3.A R40.2 | length 1.6
  Top Layer w0.22: R40.2 37.287,23.862 D3.A
NetD4_A: D4.A R41.2 | length 2.3
  Top Layer w0.22: D4.A R41.2@30.951,24.384
  Top Layer w0.3: R41.2@30.951,24.384 R41.2
NetJ1_2: J1.2 R35.2 | length 2.5
  Top Layer w0.22: J1.2@8.8,13.175 R35.2@11.35,13.175
NetJ1_3: J1.3 R36.2 R39.2 | length 4
  Top Layer w0.22: J1.3@8.8,12.375 R36.2@11.275,12.375 ; R36.2 11.455,12.045 R39.2
NetP14_2: P14.2 R15.2 | length 14.8
  Top Layer w0.22: P14.2 12.75,4.175 13.3,4.725 13.3,6.625 14.197,7.522 14.197,11.197 15.075,12.075 v1(15.075,13.1) ; v1@14.425,15.8 v1(14.425,15.7) R15.2@14.425,16.875
  Bottom Layer w0.22: v1(14.425,15.7) 15.075,15.05 v1(15.075,13.1)
NetP14_3: P14.3 R8.2 | length 17.8
  Top Layer w0.22: P14.3 11.475,2.925 10.7,3.7 10.7,6.325 11.275,6.9 12.925,6.9 13.825,7.8 13.825,11.525 14.3,12 v1(14.3,12.375) ; R8.2 13.65,16.3 v1(13.65,14.825)
  Bottom Layer w0.22: v1(13.65,14.825) 14.3,14.175 v1(14.3,12.375)
NetQ1_4: Q1.4 Q3.3 R1.1 | length 4.5
  Top Layer w0.22: Q3.3 31.5,33.75 32.405,34.655 Q1.4@32.405,37.6
NetQ2_4: Q2.4 Q4.3 R2.1 | length 4.5
  Top Layer w0.22: Q4.3 15,33.725 15.905,34.63 Q2.4@15.905,37.6
NetQ5_4: Q5.4 Q7.3 R3.1 | length 4.5
  Top Layer w0.22: Q7.3 26,33.75 26.905,34.655 Q5.4@26.905,37.6
NetQ6_4: Q6.4 Q8.3 R4.1 | length 4.5
  Top Layer w0.22: Q8.3 9.5,33.75 10.405,34.655 Q6.4@10.405,37.6
NetQ9_4: Q9.4 Q11.3 R6.1 | length 4.5
  Top Layer w0.22: Q11.3 20.5,33.75 21.405,34.655 Q9.4@21.405,37.6
NetQ10_4: Q10.4 Q12.3 R7.1 | length 4.5
  Top Layer w0.22: Q12.3 4,33.775 4.905,34.68 4.905,35.715 Q10.4@4.905,37.6
NetQ13_4: Q13.4 Q14.3 R10.1 | length 4.5
  Top Layer w0.22: Q14.3 48,33.8 48.905,34.705 Q13.4@48.905,37.6
NetQ15_4: Q15.4 Q16.3 R11.1 | length 4.5
  Top Layer w0.22: Q16.3 42.5,33.725 43.405,34.63 Q15.4@43.405,37.6
NetQ17_4: Q17.4 Q18.3 R12.1 | length 4.5
  Top Layer w0.22: Q18.3 37,33.775 37.905,34.68 Q17.4@37.905,37.6
NRST: P6.3 R14.1 U1.7 | length 7.8
  Top Layer w0.22: U1.7@30,17.55 32.75,17.55 ; R14.1 32.75,17.6 36.299,17.6 P6.3 ; P6.3@36.984,17.55 P6.3@37.211,17.323
PA4: U1.20
PA5: U1.21
PA6: U1.22
PB9: U1.62
PC0: U1.8
PC1: U1.9
PC4: U1.24
PC5: U1.25
PITCHA: Q3.1 R17.2 U1.37 | length 27.7
  Top Layer w0.22: U1.37@18,20.05 16.575,20.05 14.425,22.2 14.425,25.6 16.925,28.1 27.325,28.1 27.816,28.592 29.992,28.592 30.55,29.15 Q3.1@30.55,31.35
PITCHAN: Q1.2 R18.2 U1.23 | length 15.6
  Top Layer w0.22: U1.23@24.75,24.3 v1(24.75,26.675) ; v1(28.6,30.3) 28.6,31.3 29.865,32.565 Q1.2@29.865,37.6
  Bottom Layer w0.22: v1(24.75,26.675) 28.375,30.3 v1(28.6,30.3)
PITCHAOUT: P2.1 Q1.5 Q1.6 Q1.7 Q1.8 | length 6.9
  Top Layer w0.75: P2.1 28.595,43.905 28.595,42.4 29.865,42.4 31.135,42.4 Q1.5@32.405,42.4
PITCHB: Q7.1 R22.2 U1.38 | length 23.5
  Top Layer w0.22: U1.38@18,19.55 16.275,19.55 13.925,21.9 13.925,25.775 16.75,28.6 24.225,28.6 25.05,29.425 Q7.1@25.05,31.35
PITCHBN: Q5.2 R23.2 U1.26 | length 14.7
  Top Layer w0.22: v1(23.1,30.175) R23.2 24.365,32.59 Q5.2@24.365,37.6 ; U1.26@23.25,24.3 23.25,25.225 23.85,25.825 v1(24,25.825) v1@24,25.7
  Bottom Layer w0.22: v1(23.1,30.175) 23.1,27.95 24,27.05 v1(24,25.825)
PITCHBOUT: P2.2 Q5.5 Q5.6 Q5.7 Q5.8 | length 6.7
  Top Layer w0.75: Q5.8@23.095,42.4 Q5.7@24.365,42.4 ; P2.2 24.365,44.405 Q5.7@24.365,42.4 ; Q5.5@26.905,42.4 25.635,42.4 25,42.4 Q5.7@24.365,42.4
PITCHC: Q11.1 R28.2 U1.39 | length 19.4
  Top Layer w0.22: U1.39@18,19.05 15.975,19.05 13.45,21.575 13.45,25.95 16.875,29.375 19.475,29.375 19.55,29.45 Q11.1@19.55,31.35
PITCHCN: Q9.2 R34.2 U1.27 | length 17.5
  Top Layer w0.22: v1(17.6,30.275) R34.2 18.865,32.665 Q9.2@18.865,37.6 ; U1.27@22.75,24.3 22.75,26.092 v1(23.24,26.582)
  Bottom Layer w0.22: v1@17.662,30.337 19.485,30.337 v1(23.24,26.582)
PITCHCOUT: P2.3 Q9.5 Q9.6 Q9.7 Q9.8 | length 6.8
  Top Layer w0.75: Q9.8@17.595,42.4 18.865,42.4 20.135,42.4 21.405,42.4 21.405,43.985 P2.3
ROLLA: Q4.1 R19.2 U1.41 | length 16.9
  Top Layer w0.22: Q4.1@14.05,31.35 14.05,29.625 12.975,28.55 12.975,21.275 16.2,18.05 U1.41@18,18.05
ROLLAN: Q2.2 R33.2 U1.34 | length 19.4
  Top Layer w0.22: v1(12.1,30.275) R33.2@12.1,31.525 ; R33.2@12.1,31.55 13.365,32.815 Q2.2@13.365,37.6 ; v1(15.35,24.975) 15.55,24.975 16.375,24.15 16.375,22.475 17.3,21.55 U1.34@18,21.55
  Bottom Layer w0.22: v1(12.1,30.275) 12.1,27.85 v1@15.025,24.925
ROLLAOUT: P3.1 Q2.5 Q2.6 Q2.7 Q2.8 | length 6.7
  Top Layer w0.75: Q2.8@12.095,42.4 13.365,42.4 14,42.4 Q2.6@14.635,42.4 ; P3.1 14.635,44.365 Q2.6@14.635,42.4 ; Q2.5@15.905,42.4 Q2.6@14.635,42.4
ROLLB: Q8.1 R15.1 R24.2 U1.42 | length 19.4
  Top Layer w0.22: Q8.1 8.625,31.45 9.25,30.825 R24.2 12.45,27.625 12.45,20.45 R15.1 14.975,18.525 15.95,17.55 U1.42@18,17.55
ROLLBN: Q6.2 R25.2 U1.35 | length 24.4
  Top Layer w0.22: R25.2 7.865,32.665 v1(7.865,33.775) Q6.2@7.865,37.6 ; v1(15.4,23.95) 15.925,23.425 15.925,22.125 17,21.05 U1.35@17.9,21.05
  Bottom Layer w0.22: v1@7.825,33.75 11.35,30.225 11.35,27.575 14.975,23.95 v1(15.4,23.95)
ROLLBOUT: P3.2 Q6.5 Q6.6 Q6.7 Q6.8 | length 6.8
  Top Layer w0.75: Q6.8@6.595,42.4 7.865,42.4 9.135,42.4 10.405,42.4 10.405,43.945 P3.2
ROLLC: Q12.1 R8.1 R29.2 U1.43 | length 26.2
  Top Layer w0.22: Q12.1@3.05,31.35 3.05,29.575 3.875,28.75 10.2,28.75 11.975,26.975 11.975,19.575 R8.1 13.85,17.7 15.025,17.7 15.675,17.05 U1.43@18,17.05
ROLLCN: Q10.2 R30.2 U1.36 | length 29
  Top Layer w0.22: R30.2@1.2,31.3 2.365,31.3 ; Q10.2@2.365,37.6 2.365,31.3 ; v1(11.225,26.575) 9.6,28.2 3.175,28.2 2.365,29.01 2.365,31.3 ; v1(15.175,22.925) 15.175,22.175 16.8,20.55 U1.36@18,20.55
  Bottom Layer w0.22: v1@11.575,26.575 v1@15.2,22.95
ROLLCOUT: P3.3 Q10.5 Q10.6 Q10.7 Q10.8 | length 9.3
  Top Layer w0.75: Q10.8@1.095,42.4 2.365,42.4 3.635,42.4 4.905,42.4 4.905,43.155 6.75,45 P3.3
RX: P11.3 U1.52 | length 13.2
  Top Layer w0.22: P11.3 15.975,2.925 17.65,4.6 17.65,6.825 18.9,8.075 20.4,8.075 21.75,9.425 U1.52@21.75,12.3
SCL: P1.1 R37.1 U1.29 U3.6 | length 29.6
  Top Layer w0.22: P1.1@1.5,24.475 5.475,24.475 6.79,23.16 6.79,21.5 6.79,20.335 R37.1@7.8,19.325 ; v1@21.75,21.7 U1.29@21.75,24.3
  Bottom Layer w0.22: v1(6.2,23.825) 6.875,23.15 10.8,23.15 12.75,21.2 19.05,21.2 19.55,21.7 v1(21.825,21.7)
SDA: P1.2 R38.1 U1.30 U3.5 | length 28.6
  Top Layer w0.22: P1.2 v1(5.175,23.225) 5.52,22.88 5.52,21.5 5.52,20.155 R38.1 ; v1(21.075,20.925) 21.075,22.55 21.25,22.725 U1.30@21.25,24.3
  Bottom Layer w0.22: v1(5.175,23.225) 5.775,22.625 10.4,22.625 12.35,20.675 19.575,20.675 19.825,20.925 20.825,20.925 v1(21.075,20.925)
SWCLK: P5.3 U1.49 | length 5.1
  Top Layer w0.22: v1(20.25,10.575) U1.49@20.25,12.3
  Bottom Layer w0.22: P5.3 17.6,9.675 18.5,10.575 v1(20.25,10.575)
SWDIO: P5.1 U1.46 | length 7.9
  Top Layer w0.22: P5.1 15.1,9.625 16.225,10.75 16.225,14.45 17.325,15.55 U1.46@18,15.55
TX: P11.2 U1.51 | length 11.6
  Top Layer w0.22: v1(20.275,9.4) 21.25,10.375 U1.51@21.25,12.3
  Bottom Layer w0.22: P11.2 16.25,4.175 17.875,5.8 17.875,7.69 18.398,8.213 19.413,8.213 20.275,9.075 v1(20.275,9.4)
USB_DISC: R39.1 U1.50 | length 20.4
  Top Layer w0.22: v1(10.592,7.976) 11.455,8.839 R39.1 ; U1.50 20.75,14.07 21.525,14.845 v1(21.525,15.55)
  Bottom Layer w0.22: v1(10.592,7.976) 10.592,8.128 13.538,11.074 17.12,11.074 18.212,12.167 20.877,12.167 21.525,12.814 v1(21.525,15.55)
YAWA: Q14.1 R20.2 U1.14 | length 22.4
  Top Layer w0.22: U1.14@30,21.05 30.95,21.05 37.725,27.825 45.4,27.825 47.05,29.475 Q14.1@47.05,31.35
YAWAN: Q13.2 R21.2 U1.58 | length 39.5
  Top Layer w0.22: v1(24.257,14.351) 24.75,13.858 U1.58 ; v1(40.25,28.65) 43.75,28.65 45.1,30 R21.2 46.4,32.75 46.4,37.565 Q13.2@46.365,37.6
  Bottom Layer w0.22: v1(24.257,14.351) 24.488,14.12 28.045,14.12 35.4,21.475 35.4,24.931 39.119,28.65 v1(40.25,28.65)
YAWAOUT: P4.1 Q13.5 Q13.6 Q13.7 Q13.8 | length 9.4
  Top Layer w0.75: P4.1 43.45,45 45.095,43.355 45.095,42.4 46.365,42.4 47.635,42.4 Q13.5@48.905,42.4
YAWB: Q16.1 R26.2 U1.15 | length 16.6
  Top Layer w0.22: U1.15@30,21.55 30.675,21.55 37.65,28.525 39,28.525 39.925,29.45 41.3,29.45 R26.2 Q16.1@41.55,31.35
YAWBN: Q15.2 R27.2 U1.59 | length 33
  Top Layer w0.22: U1.59 v1@25.25,14.78 ; v1(39.625,30.15) R27.2 40.865,32.665 Q15.2@40.865,37.6
  Bottom Layer w0.22: v1(25.248,14.783) 28.058,14.783 34.725,21.45 34.725,25.25 v1(39.625,30.15)
YAWBOUT: P4.2 Q15.5 Q15.6 Q15.7 Q15.8 | length 6.8
  Top Layer w0.75: P4.2 39.595,43.965 39.595,42.4 40.865,42.4 42.135,42.4 Q15.5@43.405,42.4
YAWC: Q18.1 R31.2 U1.16 | length 11.7
  Top Layer w0.22: U1.16@30.35,22.05 36.05,27.75 Q18.1@36.05,31.35
YAWCN: Q17.2 R32.2 U1.61 | length 30.4
  Top Layer w0.22: v1(25.933,15.697) 26.25,15.381 U1.61 ; v1(34.225,27.05) 34.025,27.25 34.025,31.4 R32.2 35.365,32.74 Q17.2@35.365,37.6
  Bottom Layer w0.22: v1(25.933,15.697) 28.272,15.697 34.225,21.65 v1(34.225,27.05)
YAWCOUT: P4.3 Q17.5 Q17.6 Q17.7 Q17.8 | length 6.7
  Top Layer w0.75: Q17.8@34.095,42.4 Q17.7@35.365,42.4 ; P4.3 35.365,44.345 Q17.7@35.365,42.4 ; Q17.5@37.905,42.4 36.635,42.4 35.9,42.4 Q17.7@35.365,42.4
pads on no net: C11.0 C12.0 D1.0 D2.0 D3.0 D4.0 D5.0 J1.4 J1.MH1 J1.MH2 U1.2 U1.3 U1.4 U1.40 ZQ1.3 ZQ1.4

## Polygon pours and split planes (outlines as drawn)
GND on Bottom Layer "Keep-Out Layer-No Net" (solid, remove dead copper, pour order 2): -0.333,0 50,0 50,49.667 -0.333,49.667

## Keep-outs
Keep-Out Layer:
  the board outline again, w0.22

## Other copper
Top Layer:
  rectangle net ROLLCOUT: 0.66,41.326 5.461,44.882
  rectangle net ROLLBOUT: 6.172,41.326 10.846,43.637
  rectangle net ROLLAOUT: 11.659,41.326 16.307,43.637
  rectangle net PITCHCOUT: 17.221,41.326 21.844,43.637
  rectangle net PITCHBOUT: 22.657,41.326 27.381,43.637
  rectangle net PITCHAOUT: 28.143,41.326 32.817,43.637
  rectangle net YAWCOUT: 33.706,41.326 38.633,43.637
  rectangle net YAWBOUT: 39.141,41.326 43.866,43.637
  rectangle net YAWAOUT: 44.729,41.326 49.276,44.958
  rectangle net "12V MOTOR": 45.618,20.828 49.124,26.543
  rectangle net 12V: 45.923,10.668 48.59,14.021
  rectangle net 12V: 44.196,13.31 49.047,16.815
  rectangle net GND: 41.859,20.777 45.187,26.568
Bottom Layer:
  rectangle net "12V MOTOR": 45.618,23.597 48.387,26.543

## Silkscreen, mask and mechanical layers (free items; w line width, h text height)
Top Overlay:
  text "Roll" at 9.068,47.4 h1.52
  text "Pitch" at 21.844,47.4 h1.52
  text "Yaw" at 36.3,47.4 h1.52
  text "I2C" at 1.15,26.35 h0.6
  text "PWR" at 38.735,25.603 h0.5
  text "B" at 40.767,21.184 h0.6
  text "R" at 40.767,20.193 h0.6
  text "EvvGC" at 14.656,19.533 h2 r90
  text "SWD" at 14.775,11.725 h0.6
  text "+" at 44.025,11.175 h2
  text "AUX2" at 21.375,8.225 h0.6
  text "AUX3" at 24.35,8.2 h0.6
  text "AUX1" at 18.775,8.175 h0.6
  text "-" at 44.15,8.15 h2
  text "AUX4" at 27.45,8.1 h0.6
  text "AUX5" at 30.475,8.1 h0.6
  text "UART4" at 14.475,7.125 h0.6
  text "20130711" at 45.695,6.147 h0.5
  text "vpre1.3-ce2" at 44.018,5.207 h0.5
  text "UART1" at 10.3,3.575 h0.6 r90

## Text inside footprints (layer, text, board x,y; h text height)
J1: Mechanical 1 "PCB Edge" at 0.254,16.406 h0.25 r270